# EAGLE board RPi_Controller 4 (EAGLE 5.04)
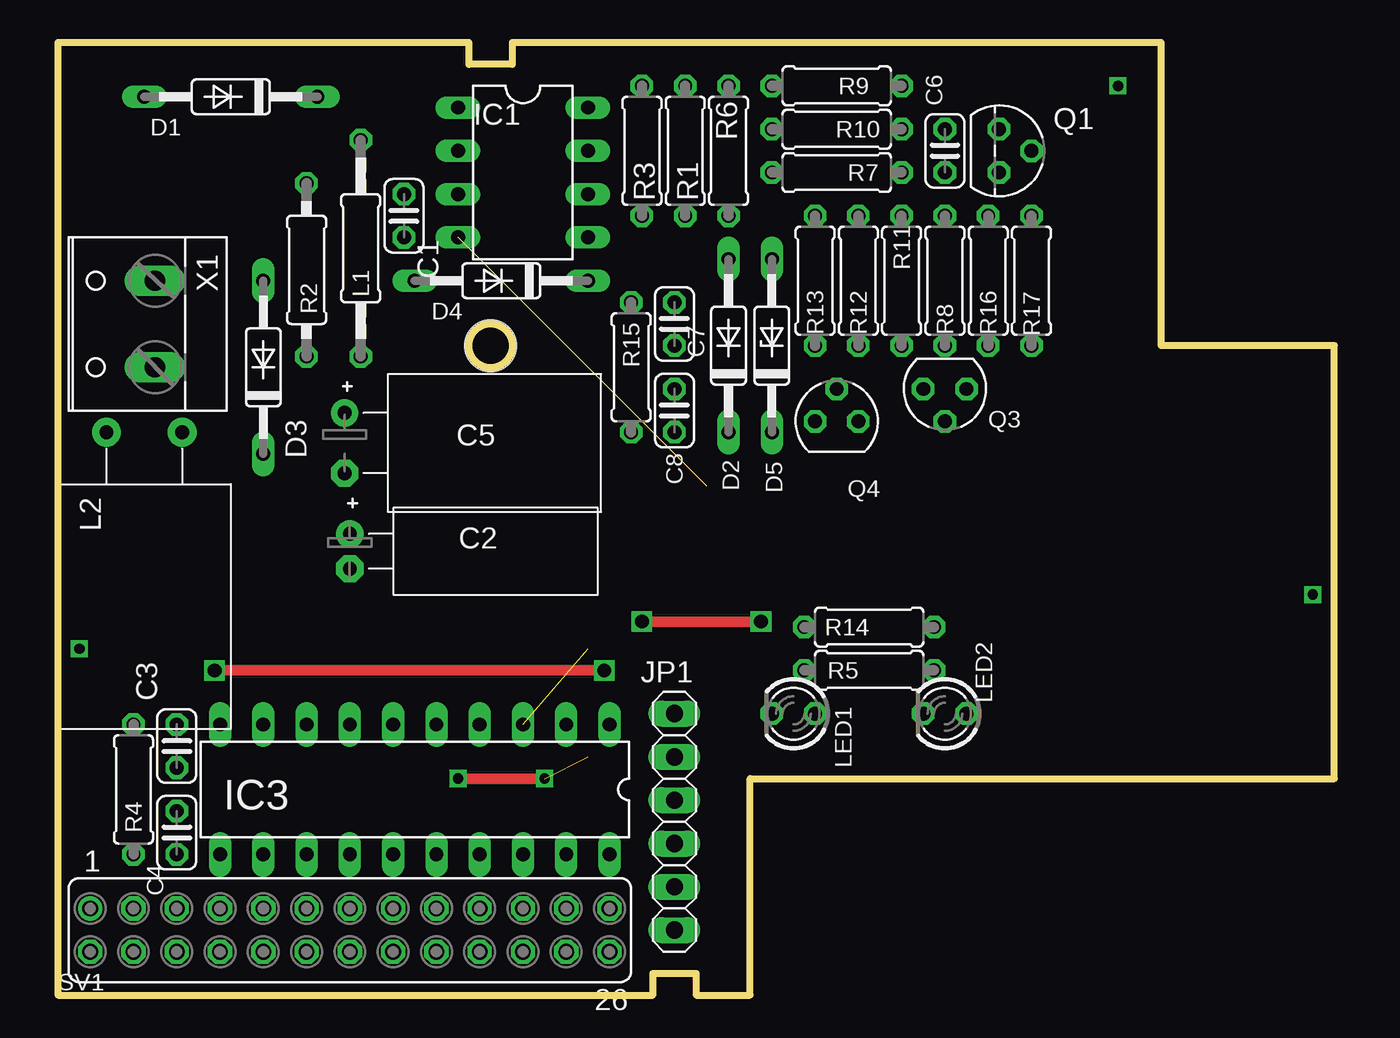
[diagram p0: board, top side]
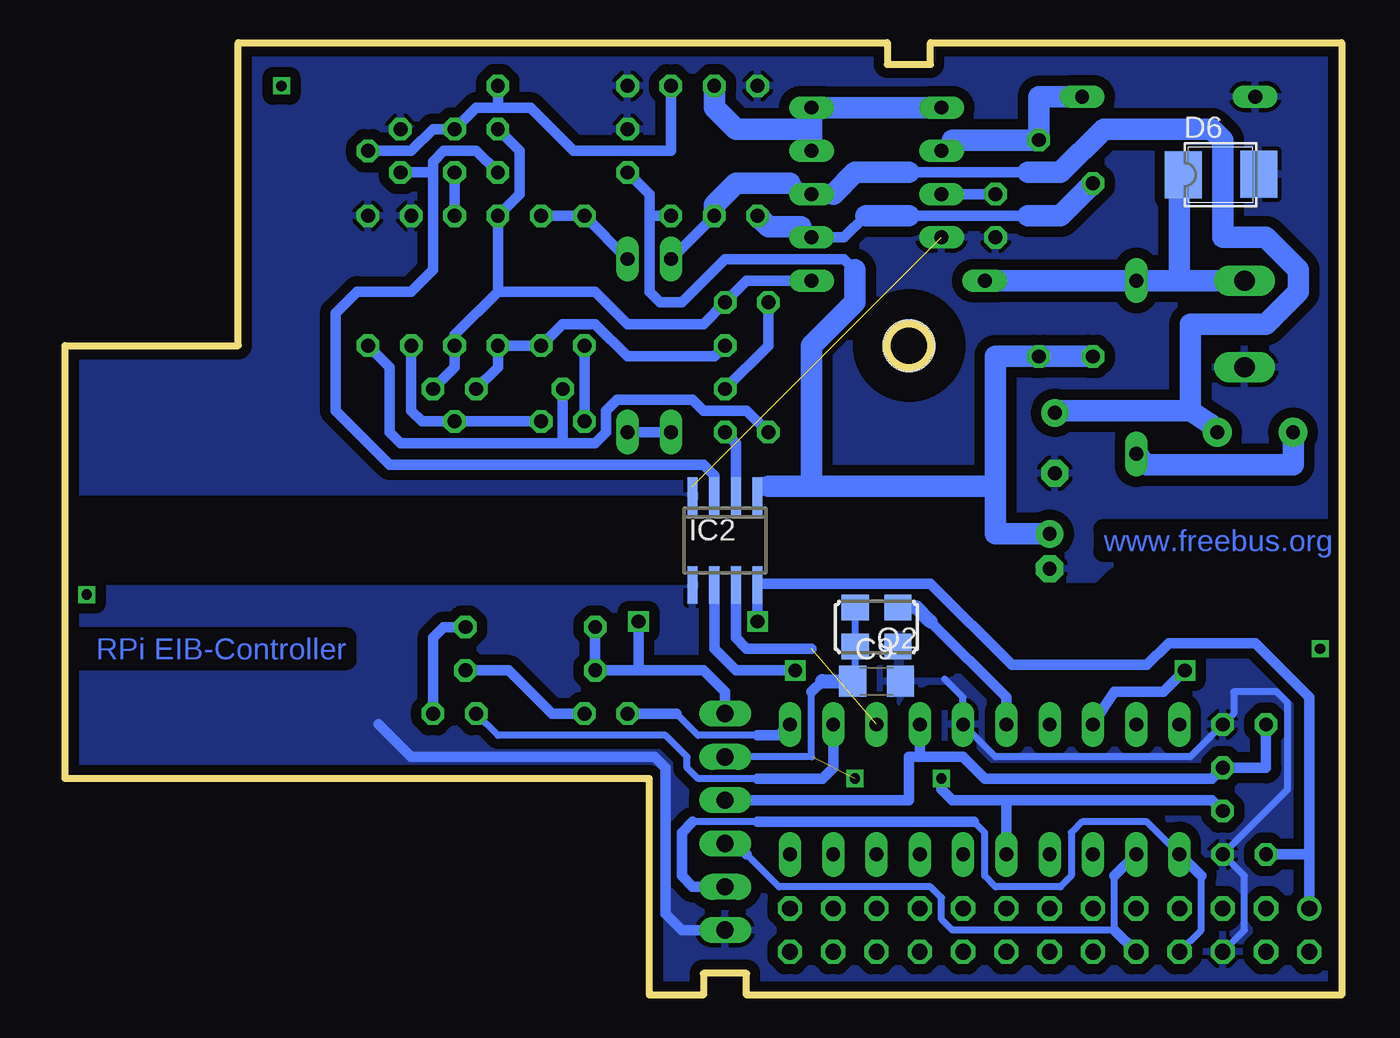
[diagram p1: board, bottom side, seen from below]

Size 74.93 x 55.88 mm. Coordinates in mm from the lower left corner, seen from the top.
Outline: 0,0 34.92,0 34.92,1.27 37.47,1.27 37.47,0 40.64,0 40.64,12.7 74.93,12.7 74.93,38.1 64.77,38.1 64.77,55.88 26.67,55.88 26.67,54.61 24.13,54.61 24.13,55.88 0,55.88 0,0
Outline: circle at 25.4,38.1 radius 1.27
Copper layers (1*16): Top 0.035mm / dielectric 1.5mm / Bottom 0.035mm
Design rules "default *": minimum track width 16mil, minimum drill 24mil, track to track 20mil, track to pad 10mil, pad to pad 10mil, via to via 10mil, smd to smd 10mil, copper to edge 8mil, drill to drill 8mil, minimum pad ring 10mil, minimum via ring 8mil, stop-mask expansion 4mil, vias tented up to drill 0mil, thermal gap 10mil
Holes 3 mm at 25.4,38.1
tRestrict: area 24,36.7 to 26.8,39.5
bRestrict: area 24,36.7 to 26.8,39.5; 10 lines
vRestrict: area 36.8,45.7 to 53.3,55.9; area 57.1,33 to 64.8,55.9; area 10.2,45.7 to 16.5,52.1; area 10.2,16.5 to 15.2,39.4

## Footprints (pad centres in the part's own frame; a part is rotated, then mirrored left to right if it is on the bottom)
C025-024X044 = drill 0.813 octagon: 1 -1.27,0; 2 1.27,0
2-5X11 = drill 0.813 pad 1.6 round: + -1.02,0 | drill 0.813 pad 1.6 octagon: - 1.02,0
3,5-8X13 = drill 0.813 pad 1.6 round: + -1.77,-0.31 | drill 0.813 pad 1.6 octagon: - 1.77,-0.31
C1206 = smd 1.6 x 1.8: 1 -1.4,0; 2 1.4,0
DO35-10 = drill 0.813 long: A 5.08,0; C -5.08,0
DO35Z10 = drill 0.813 long: A 5.08,0; C -5.08,0
SMB = smd 2.159 x 2.743: 1 -2.311,-0.127; 2 2.108,-0.102
DIL08 = drill 0.813 long: 1 -3.81,-3.81; 2 -1.27,-3.81; 3 1.27,-3.81; 4 3.81,-3.81; 5 3.81,3.81; 6 1.27,3.81; 7 -1.27,3.81; 8 -3.81,3.81
SO8 = smd 0.6 x 2.2: 1 -1.905,-2.6; 2 -0.635,-2.6; 3 0.635,-2.6; 4 1.905,-2.6; 5 1.905,2.6; 6 0.635,2.6; 7 -0.635,2.6; 8 -1.905,2.6
DIL20 = drill 0.813 long: 1 -11.43,-3.81; 2 -8.89,-3.81; 3 -6.35,-3.81; 4 -3.81,-3.81; 5 -1.27,-3.81; 6 1.27,-3.81; 7 3.81,-3.81; 8 6.35,-3.81; 9 8.89,-3.81; 10 11.43,-3.81; 11 11.43,3.81; 12 8.89,3.81; 13 6.35,3.81; 14 3.81,3.81; 15 1.27,3.81; 16 -1.27,3.81; 17 -3.81,3.81; 18 -6.35,3.81; 19 -8.89,3.81; 20 -11.43,3.81
1X06 = drill 1.016 long: 1 -6.35,0; 2 -3.81,0; 3 -1.27,0; 4 1.27,0; 5 3.81,0; 6 6.35,0
0207/12 = drill 0.813 octagon: 1 -6.35,0; 2 6.35,0
RCL_11PH = drill 0.8 pad 1.676 round: P$1 -2.223,0; P$2 2.223,0
LED3MM = drill 0.813 octagon: A -1.27,0; K 1.27,0
TO92 = drill 0.813 octagon: 1 1.27,0; 2 0,1.905; 3 -1.27,0
ASF = smd 1.6 x 1.5: 1 -1.25,-1.15; 2 1.25,-1.15; 3 1.25,1.15; 4 -1.25,1.15
SOT54D = drill 0.813 octagon: B 1.27,0; C 0,1.905; E -1.27,0
SOT54A = drill 0.813 octagon: B 0,1.905; C -1.27,0; E 1.27,0
0207/7 = drill 0.813 octagon: 1 -3.81,0; 2 3.81,0
0207/10 = drill 0.813 octagon: 1 -5.08,0; 2 5.08,0
FE13-2 = drill 0.914 round: 1 -15.24,1.27 | drill 0.914 octagon: 2 -15.24,-1.27; 3 -12.7,1.27; 4 -12.7,-1.27; 5 -10.16,1.27; 6 -10.16,-1.27; 7 -7.62,1.27; 8 -7.62,-1.27; 9 -5.08,1.27; 10 -5.08,-1.27; 11 -2.54,1.27; 12 -2.54,-1.27; 13 0,1.27; 14 0,-1.27; 15 2.54,1.27; 16 2.54,-1.27; 17 5.08,1.27; 18 5.08,-1.27; 19 7.62,1.27; 20 7.62,-1.27; 21 10.16,1.27; 22 10.16,-1.27; 23 12.7,1.27; 24 12.7,-1.27; 25 15.24,1.27; 26 15.24,-1.27
W237-132 = drill 1.194 long: 1 -2.54,-0.635; 2 2.54,-0.635

## Placement (x,y rotation side)
C1  470p  [C025-024X044]  20.32,45.72 270 top
C2  100µ  [2-5X11]  17.14,26.04 270 top
C3  100n  [C025-024X044]  6.99,14.61 270 top
C4  100n  [C025-024X044]  6.99,9.53 90 top
C5  100µ  [3,5-8X13]  17.14,32.38 270 top
C6  100n  [C025-024X044]  52.07,49.53 90 top
C7  10n  [C025-024X044]  36.2,39.37 90 top
C8  10n  [C025-024X044]  36.2,34.29 90 top
C9  10n  [C1206]  27.3,18.41 0 bottom
D1  BAT46  [DO35-10]  10.16,52.7 180 top
D2  1N4148  [DO35-10]  39.37,38.1 90 top
D3  1N4148  [DO35-10]  12.06,36.83 90 top
D4  1N4148  [DO35-10]  26.04,41.91 180 top
D5  7V5  [DO35Z10]  41.91,38.1 90 top
D6  SMAJ43CA  [SMB]  6.99,48.26 0 bottom
IC1  MC34063AP  [DIL08]  27.3,48.26 270 top
IC2  ADUM1201  [SO8]  36.2,26.67 180 bottom
IC3  89LPC922  [DIL20]  20.95,12.06 180 top
JP1  ISP  [1X06]  36.2,10.16 270 top
L1  220µ  [0207/12]  17.78,43.81 270 top
L2  150mH  [RCL_11PH]  5.08,33.02 180 top
LED1  rot  [LED3MM]  43.18,16.51 180 top
LED2  gruen  [LED3MM]  52.07,16.51 180 top
Q1  BC557  [TO92]  55.24,49.53 270 top
Q2  ASF1  [ASF]  27.3,21.59 0 bottom
Q3  BC640  [SOT54D]  52.07,35.56 180 top
Q4  BC547  [SOT54A]  45.72,33.66 0 top
R1  3R3  [0207/7]  36.83,49.53 270 top
R2  3k6  [0207/10]  14.61,42.55 270 top
R3  2k2  [0207/7]  34.29,49.53 270 top
R4  4k7  [0207/7]  4.45,12.06 90 top
R5  1k  [0207/7]  47.62,19.05 180 top
R6  82k  [0207/7]  39.37,49.53 90 top
R7  10k  [0207/7]  45.72,48.26 0 top
R8  10k  [0207/7]  52.07,41.91 90 top
R9  47k  [0207/7]  45.72,53.34 180 top
R10  100k  [0207/7]  45.72,50.8 180 top
R11  2k2  [0207/7]  49.53,41.91 90 top
R12  1k  [0207/7]  46.99,41.91 90 top
R13  2k2  [0207/7]  44.45,41.91 90 top
R14  1k  [0207/7]  47.62,21.59 180 top
R15  5k6  [0207/7]  33.66,36.83 90 top
R16  5R6  [0207/7]  54.61,41.91 90 top
R17  100k  [0207/7]  57.15,41.91 270 top
SV1  RPi Head  [FE13-2]  17.14,3.81 0 top
X1  BUS  [W237-132]  5.08,39.37 90 top

## Library data of the parts
C1 C3 C4 C6-C9 L1 R1-R17 = rcl
C2 C5 L2 = LPC_Gira3
D1-D5 = diode
D6 = semicon-smd-ipc
IC1 = mc34063
IC2 = Bus-isolators
IC3 = micro-philips
JP1 = pinhead
LED1 LED2 = led
Q1 = transistor-pnp
Q2 = crystal
Q3 Q4 = transistor-small-signal
SV1 = con-lsta
X1 = con-wago-508

## Nets
/RESET: C3.2 IC3.4 JP1.3 R4.2
BASE: C6.2 Q1.2 R6.2 R9.1
EIB+: D3.A D4.A D6.1 X1.2
FETGATE: Q4.B R15.1 R17.2
GND1: C1.2 C2.- C5.- D1.A D6.2 IC1.4 IC2.4 Q1.3 R3.1 R9.2 R10.2 R16.2 R17.1 X1.1
GND2: C3.1 C4.1 C9.2 IC2.5 IC3.5 JP1.6 Q2.2 SV1.6
N$1: Q4.C R13.1
N$2: IC2.3 Q1.1 R7.2
N$3: IC3.6 Q2.3
N$4: D2.C D5.C
N$7: IC2.7 IC3.3
N$8: IC1.1 IC1.7 IC1.8 R1.1
N$10: IC3.1 LED1.K
N$11: IC1.5 R2.1 R3.2
N$12: D1.C IC1.2 L1.1
N$13: D3.C L2.P$2
N$14: C1.1 IC1.3
N$16: C6.1 R8.2
N$17: C8.2 R15.2
N$18: Q3.C Q4.E R16.1
N$19: IC3.2 LED2.K
N$20: C8.1 IC2.2
N$21: LED2.A R14.1
N$25: D5.A R12.2 R13.2
N$28: C7.1 Q3.B R11.1 R12.1
N$29: IC3.12 JP1.4 SV1.10
N$30: IC3.11 JP1.5 SV1.8
N$41: LED1.A R5.1
SIGIN: IC2.6 IC3.8
V+: C7.2 D4.C Q3.E R8.1 R10.1 R11.2
VCC: C4.2 C9.1 IC3.15 JP1.2 Q2.1 Q2.4
VDC: C5.+ D2.A IC1.6 L2.P$1 R1.2
VDD1: C2.+ IC2.1 L1.2 R2.2 R6.1 R7.1
VDD2: IC2.8 JP1.1 R4.1 R5.2 R14.2 SV1.1

## Tracks (layer width: path | path; a pad name or v marks a point on that pad's centre or on a via)
/RESET
  Bottom 0.61: R4.2 4.45,13.34 C3.2 7.62,12.7 20.95,12.7 22.23,13.97 24.77,13.97 | 24.77,13.97 25.4,13.97 25.4,11.43 JP1.3 | 24.77,13.97 IC3.4
BASE
  Bottom 0.61: 49.53,52.07 50.8,52.07 C6.2 53.34,50.8 54.61,49.53 Q1.2 | R6.2 39.37,49.53 45.09,49.53 47.62,52.07 49.53,52.07 | 49.53,52.07 R9.1
EIB+
  Bottom 0.406: 9.65,48.26 D6.1
  Bottom 1.27: 9.53,41.91 9.53,48.26 9.65,48.26 | D4.A D3.A 9.53,41.91 | X1.2 9.53,41.91
FETGATE
  Bottom 0.61: R15.1 34.92,34.29 37.47,34.29 38.1,34.92 42.55,34.92 43.18,34.29 43.18,33.02 43.81,32.38 45.72,32.38 | 45.72,32.38 55.24,32.38 55.88,33.02 55.88,36.83 R17.2 | 45.72,32.38 Q4.B
GND1  (1 unrouted)
  Bottom 0.406: IC2.4 38.1,29.84
  pour Bottom (isolate 0.61): 18.41,22.86 13.97,22.86 12.7,24.13 0,24.13 0,55.88 24.13,55.88 24.13,54.61 26.67,54.61 26.67,55.88 64.77,55.88 64.77,38.1 74.93,38.1 74.93,27.94 23.5,27.94
GND2
  Bottom 0.406: SV1.6 5.71,3.81 5.71,6.99 C4.1 3.17,12.06 3.17,17.14 3.81,17.78 6.35,17.78 6.35,16.51 C3.1 8.89,13.97 20.32,13.97 IC3.5 22.23,17.46 23.3,18.54
  Bottom 0.61: IC2.5 38.1,23.5 | 37.47,3.81 38.73,3.81 39.69,4.76 39.69,13.34 40.32,13.97 54.61,13.97 56.52,15.88
  pour Bottom (isolate 0.61): 0,21.59 11.43,21.59 12.7,20.32 19.68,20.32 24.77,25.4 74.93,25.4 74.93,12.7 40.64,12.7 40.64,0 37.47,0 37.47,1.27 34.92,1.27 34.92,0 0,0
N$1
  Bottom 0.61: Q4.C R13.1
N$2
  Bottom 0.406: IC2.3 36.83,30.48
  Bottom 0.61: 36.83,30.48 37.47,31.11 55.88,31.11 59.05,34.29 59.05,40.01 57.78,41.27 54.61,41.27 53.34,42.55 53.34,48.26 | 53.34,48.26 53.34,48.9 52.7,49.53 50.8,49.53 R7.2 | 53.34,48.26 Q1.1
N$3
  Bottom 0.61: 24.13,21.91 19.68,17.46 IC3.6
  Bottom 0.813: Q2.3 24.96,22.74 24.13,21.91
N$4
  Bottom 0.61: D2.C D5.C
N$7  (1 unrouted)
  Bottom 0.61: 31.11,20.32 34.92,20.32 35.56,20.95 IC2.7
N$8
  Bottom 1.27: IC1.1 IC1.8 31.11,50.8 | 31.11,50.8 IC1.7 | 31.11,50.8 35.56,50.8 36.83,52.07 R1.1
N$10
  Bottom 0.406: 39.05,16.51 37.78,15.24 34.29,15.24
  Bottom 0.61: 39.05,16.51 LED1.K | IC3.1 33.02,15.24 34.29,15.24
N$11
  Bottom 0.61: 31.75,45.09 IC1.5 29.21,44.45 27.94,45.72 | 18.41,45.72 25.4,45.72
  Bottom 1.27: R3.2 33.66,45.09 31.75,45.09 | R2.1 16.51,45.72 18.41,45.72 | 25.4,45.72 27.94,45.72
N$12
  Bottom 0.61: 22.86,50.16 IC1.2
  Bottom 1.27: 22.86,50.16 L1.1 17.78,52.7 D1.C
N$13
  Bottom 1.27: D3.C 11.43,31.11 2.86,31.11 L2.P$2
N$14
  Bottom 0.61: C1.1 IC1.3
N$16
  Bottom 0.61: R8.2 C6.1
N$17
  Bottom 0.61: C8.2 33.66,38.1 R15.2
N$18
  Bottom 0.61: R16.1 54.61,34.29 53.98,33.66 Q3.C Q4.E
N$19
  Bottom 0.406: LED2.K 49.53,15.24 39.69,15.24 38.42,13.97 38.42,13.34 37.78,12.7 34.29,12.7
  Bottom 0.61: 34.29,12.7 30.48,12.7 29.84,13.34 IC3.2
N$20
  Bottom 0.61: C8.1 35.56,32.38 IC2.2
N$21
  Bottom 0.61: LED2.A 53.34,20.95 52.7,21.59 R14.1
N$25
  Bottom 0.61: R12.2 R13.2 D5.A
N$28
  Bottom 0.61: Q3.B 49.53,36.83 R11.1 R12.1 45.72,39.37 43.81,39.37 41.91,37.47 36.83,37.47 C7.1
N$29
  Bottom 0.406: 13.34,6.99 13.34,3.81 22.86,3.81 23.5,4.45 23.5,5.71 24.13,6.35 33.02,6.35 34.92,8.26
  Bottom 0.61: SV1.10 13.34,3.81 | 13.34,6.99 IC3.12 | 34.92,8.26 35.56,8.89 JP1.4
N$30
  Bottom 0.406: SV1.8 8.26,3.81 8.26,6.99 | 34.29,10.16 38.1,10.16 | 21.59,10.16 20.95,9.53 20.95,6.99 20.32,6.35 16.51,6.35 15.88,6.99 15.88,9.53 15.24,10.16 11.43,10.16 IC3.11
  Bottom 0.61: 8.26,6.99 IC3.11 | JP1.5 38.1,6.35 38.73,6.99 38.73,9.53 38.1,10.16 | 21.59,10.16 34.29,10.16
N$41
  Bottom 0.61: R5.1 48.9,19.05 46.35,16.51 LED1.A
S$1  (via drill 0.6)
  other vias: 73.66,23.5
S$2  (via drill 0.6)
  other vias: 1.27,20.32
S$3  (via drill 0.6)
  other vias: 62.23,53.34
SIGIN  (via drill 0.8)
  Top 0.61: v9.21,19.05 v32.07,19.05
  Bottom 0.61: IC2.6 36.83,20.32 35.56,19.05 v32.07,19.05 | IC3.8 13.34,17.78 10.48,17.78 v9.21,19.05
V+
  Bottom 0.61: 49.53,41.27 52.07,38.73 R8.1 52.07,36.83 Q3.E | 49.53,41.27 43.81,41.27 41.91,39.37 37.47,39.37 C7.2 34.92,41.91 D4.C | 49.53,41.27 R11.2 48.26,46.99 48.26,49.53 R10.1
VCC  (via drill 0.6)  (1 unrouted)
  Top 0.61: v23.5,12.7 v28.57,12.7
  Bottom 0.406: JP1.2 31.11,13.97 31.11,17.78 | Q2.4 Q2.1 28.55,18.57 C9.1
  Bottom 0.61: C4.2 7.62,11.43 19.68,11.43 | 19.68,11.43 IC3.15 | 31.11,17.78 30.48,18.41 | 19.68,11.43 22.86,11.43 23.5,12.06 v23.5,12.7
  Bottom 0.813: 30.48,18.41 C9.1
VDC
  Bottom 0.61: R1.2 D2.A | 18.41,48.26 25.4,48.26
  Bottom 1.016: 32.38,47.62 31.75,46.99 IC1.6 29.84,46.99 | L2.P$1 7.75,33.52
  Bottom 1.27: 32.38,47.62 35.56,47.62 36.83,46.35 R1.2 | 29.84,46.99 28.57,48.26 25.4,48.26 | 18.41,48.26 16.51,48.26 13.97,50.8 7.62,50.8 6.99,50.16 6.99,44.45 4.45,44.45 2.54,42.55 2.54,41.27 4.45,39.37 8.89,39.37 8.89,34.29 | 7.75,33.52 8.89,34.29 | 8.89,34.29 16.51,34.29 C5.+
VDD1
  Bottom 0.406: 34.29,29.84 IC2.1
  Bottom 0.61: 33.66,29.84 34.29,29.84 | 28.57,42.55 29.21,43.18 36.2,43.18 38.73,40.64 40.01,40.64 40.64,41.27 40.64,45.72 | 40.64,45.72 R6.1 | 40.64,45.72 40.64,46.99 R7.1
  Bottom 1.27: 31.11,29.84 33.66,29.84 | 31.11,29.84 31.11,38.1 28.57,40.64 28.57,42.55 | C2.+ 20.32,27.05 20.32,29.84 | 20.32,29.84 20.32,37.47 L1.2 R2.2 | 20.32,29.84 31.11,29.84
VDD2  (via drill 0.8)
  Top 0.61: v34.29,21.91 v41.27,21.91
  Bottom 0.406: 34.29,24.13 IC2.8
  Bottom 0.61: R14.2 R5.2 41.27,19.05 | SV1.1 1.91,8.26 | 1.91,8.26 R4.1 | 1.91,8.26 1.91,17.46 5.08,20.64 10.16,20.64 11.43,19.37 19.37,19.37 24.13,24.13 34.29,24.13 v34.29,21.91 | JP1.1 36.2,17.78 37.47,19.05 41.27,19.05 | v41.27,21.91 41.27,19.05

## Text on the board
Bottom: www.freebus.org | RPi EIB-Controller